# EAGLE board k (EAGLE 7.1.0)

Size 16.51 x 21.59 mm. Coordinates in mm from the lower left corner, seen from the top.
Outline: 0,0 16.51,0 16.51,21.59 0,21.59 0,0
Copper layers (1*16): Top 0.035mm / dielectric 1.5mm / Bottom 0.035mm
Design rules "Fusion_eagle_rule_v1.1_tms *": minimum track width 6mil, minimum drill 12mil, track to track 6mil, track to pad 6mil, pad to pad 6mil, via to via 6mil, smd to smd 0mil, copper to edge 10mil, drill to drill 10mil, minimum pad ring 10mil, minimum via ring 6mil, stop-mask expansion 2mil, vias tented up to drill 100mil, thermal gap 10mil

## Footprints (pad centres in the part's own frame; a part is rotated, then mirrored left to right if it is on the bottom)
LED_0805 = smd 1.2 x 1.2: A 0,-1.05; C 0,1.05
P1-20 = drill 0.5: TP 0,0

## Placement (x,y rotation side)
LED1  [LED_0805]  2.46,2.04 90 top
LED2  [LED_0805]  2.3,3.95 90 top
LED3  [LED_0805]  2.54,6.03 90 top
LED4  [LED_0805]  2.38,8.26 90 top
LED5  [LED_0805]  2.38,10.16 90 top
LED6  [LED_0805]  2.38,12.06 90 top
LED7  [LED_0805]  2.54,13.97 90 top
LED8  [LED_0805]  2.66,16.08 90 top
LED9  [LED_0805]  2.44,18 90 top
LED10  [LED_0805]  2.54,19.84 90 top
LED11  [LED_0805]  4.92,10.16 0 top
LED12  [LED_0805]  6.35,12.38 0 top
LED13  [LED_0805]  8.26,13.65 0 top
LED14  [LED_0805]  9.84,15.56 0 top
LED15  [LED_0805]  11.75,17.46 0 top
LED16  [LED_0805]  13.65,19.05 0 top
LED17  [LED_0805]  6.99,8.89 0 top
LED18  [LED_0805]  8.57,7.62 0 top
LED19  [LED_0805]  10.16,5.71 0 top
LED20  [LED_0805]  12.06,3.81 0 top
LED21  [LED_0805]  13.99,2.26 0 top
LED22  [LED_0805]  9.68,1.91 0 top
LED23  [LED_0805]  8.26,2.22 180 top
LED24  [LED_0805]  6.51,2.22 180 top
VIN  [P1-20]  5.24,4.6 0 top
VIN1  [P1-20]  6.03,4.6 0 top
VO1  [P1-20]  0.79,7.46 0 top
VO2  [P1-20]  0.79,12.06 0 top
VO3  [P1-20]  3.02,19.05 0 top
VO4  [P1-20]  11.75,20.48 0 top
VO5  [P1-20]  15.72,15.4 0 top
VO6  [P1-20]  15.72,8.41 0 top
VO7  [P1-20]  13.49,2.22 0 top
VO8  [P1-20]  5.71,0.95 0 top
VO9  [P1-20]  0.79,6.19 0 top
VO10  [P1-20]  0.79,13.34 0 top
VO11  [P1-20]  4.45,20 0 top
VO12  [P1-20]  10.79,20.48 0 top
VO13  [P1-20]  15.72,13.97 0 top
VO14  [P1-20]  15.72,9.37 0 top
VO15  [P1-20]  12.06,1.43 0 top
VO16  [P1-20]  4.76,0.95 0 top

## Library data of the parts
LED1-LED24 VIN VIN1 VO1-VO16 = CyberRailGuru

## Nets
N$1: LED22.C LED23.A
N$2: LED23.C LED24.A
N$3: LED2.C LED3.A
N$4: LED1.C LED2.A
N$5: LED24.C VO8.TP VO16.TP
N$7: LED5.C LED6.A
N$8: LED4.C LED5.A
N$11: LED8.C LED9.A
N$12: LED7.C LED8.A
N$15: LED11.C LED12.A
N$16: LED10.C LED11.A
N$19: LED14.C LED15.A
N$20: LED13.C LED14.A
N$23: LED17.C LED18.A
N$24: LED16.C LED17.A
N$27: LED20.C LED21.A
N$28: LED19.C LED20.A
VIN: LED1.A LED4.A LED7.A LED10.A LED13.A LED16.A LED19.A LED22.A VIN1.TP VIN.TP
VOUT1: LED3.C VO1.TP VO9.TP
VOUT2: LED6.C VO2.TP VO10.TP
VOUT3: LED9.C VO3.TP VO11.TP
VOUT4: LED12.C VO4.TP VO12.TP
VOUT5: LED15.C VO5.TP VO13.TP
VOUT6: LED18.C VO6.TP VO14.TP
VOUT7: LED21.C VO7.TP VO15.TP

## Tracks (layer width: path | path; a pad name or v marks a point on that pad's centre or on a via)
N$1  (1 unrouted)
N$2  (1 unrouted)
N$3  (1 unrouted)
N$4  (1 unrouted)
N$5  (2 unrouted)
N$7  (1 unrouted)
N$8  (1 unrouted)
N$11  (1 unrouted)
N$12  (1 unrouted)
N$15  (1 unrouted)
N$16  (1 unrouted)
N$19  (1 unrouted)
N$20  (1 unrouted)
N$23  (1 unrouted)
N$24  (1 unrouted)
N$27  (1 unrouted)
N$28  (1 unrouted)
VIN  (9 unrouted)
VOUT1  (2 unrouted)
VOUT2  (2 unrouted)
VOUT3  (2 unrouted)
VOUT4  (2 unrouted)
VOUT5  (2 unrouted)
VOUT6  (2 unrouted)
VOUT7  (2 unrouted)

## Text on the board
201bmp: K